# Altium PCB imu_sense.PcbDoc (part 2 of 2)
Units mil, origin at the board's own origin, x right, y up, seen from the top; angles counter-clockwise.
Board outline 2000 x 2000 mil, 2 copper layers (Top Layer, Bottom Layer); 188 components, 109 nets, 611 pads, 219 vias.
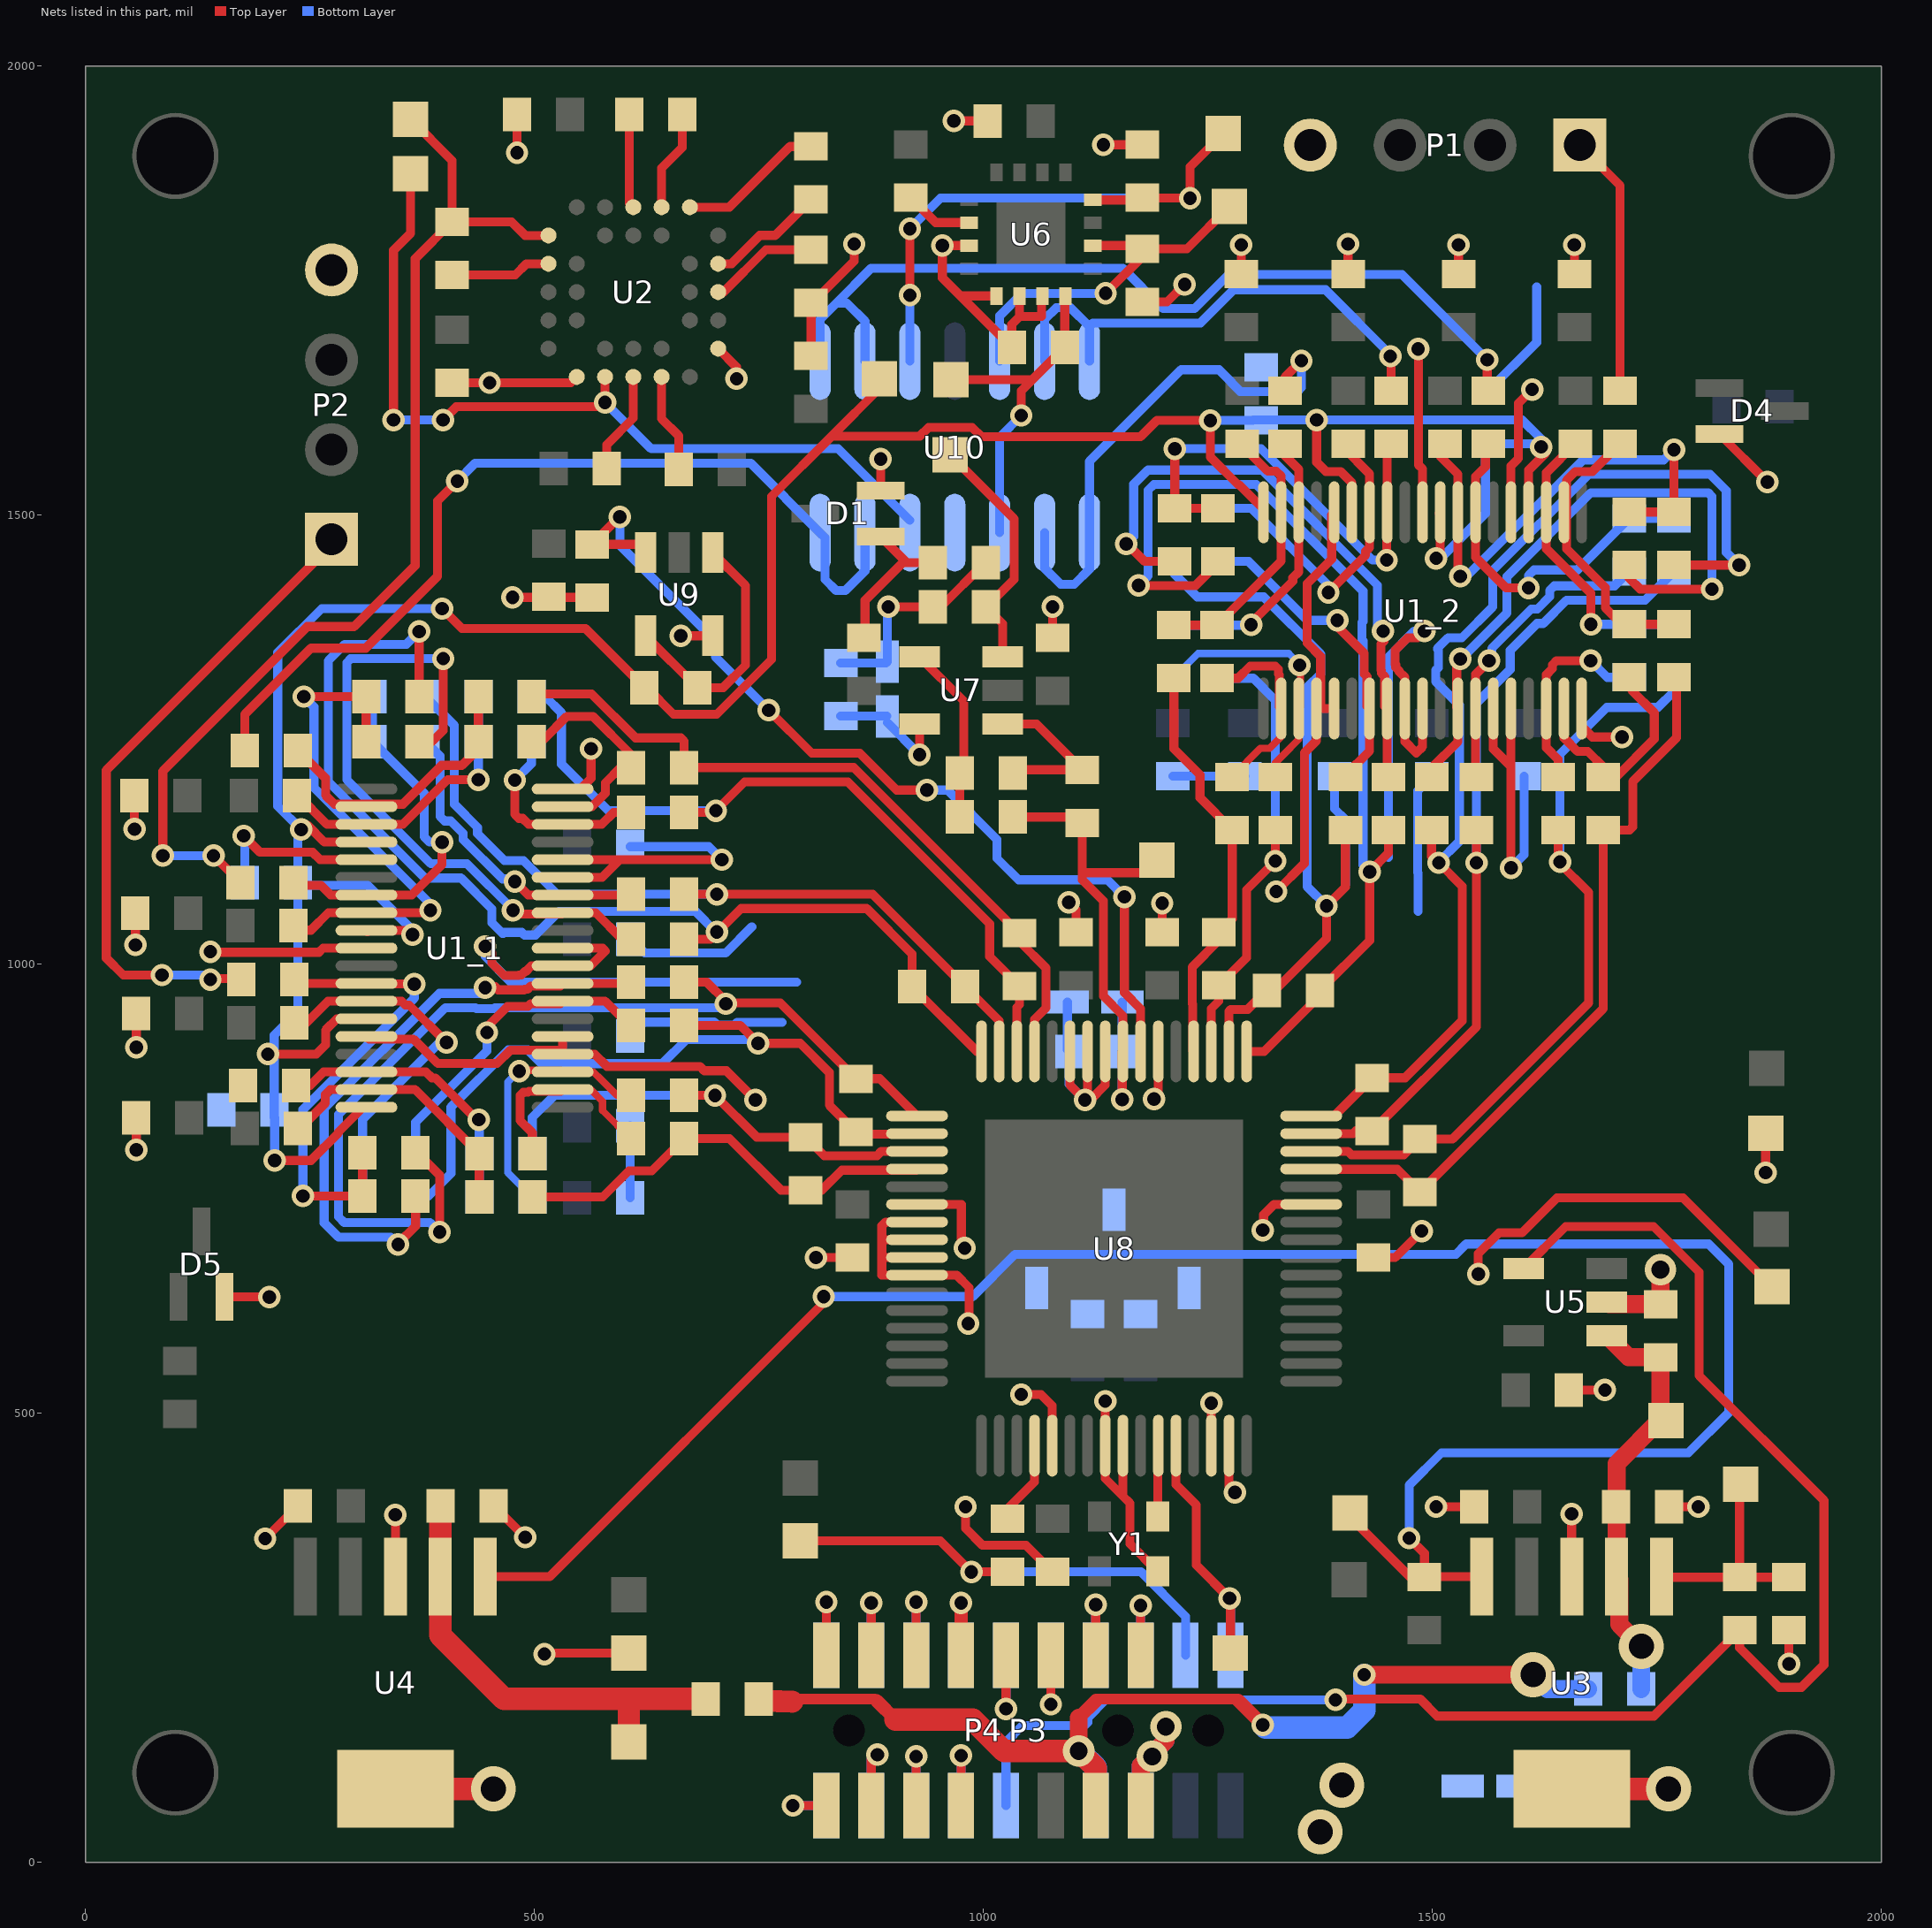
[diagram p2: the nets of this part, all layers, seen from the top]

## Via types
v1: diameter 25, hole 15, Top Layer to Bottom Layer, tented both sides, 165 vias
v2: diameter 25, hole 15, Top Layer to Bottom Layer, 31 vias
v3: diameter 50, hole 28, Top Layer to Bottom Layer, tented both sides, 7 vias
v4: diameter 50, hole 25, Top Layer to Bottom Layer, 6 vias
v5: diameter 35, hole 20, Top Layer to Bottom Layer, tented both sides, 4 vias
v6: diameter 50, hole 25, Top Layer to Bottom Layer, tented both sides, 3 vias
v7: diameter 35, hole 20, Top Layer to Bottom Layer, 2 vias
v8: diameter 40, hole 20, Top Layer to Bottom Layer, tented both sides, 1 vias

## Nets (pads, with @x,y where several pads share a name; then routed paths per layer and width w, separated by ;. In a path a pad name is that pad's centre, name@x,y a point inside that pad or via, vN(x,y) a via of type N, cw(c..) or ccw(c..) an arc to the next point about the centre after c; other vN are vias at no path point) (continued)
AGND: C2_1.1 C2_2.1 C5_1.1 C5_2.1 C8_1.1 C8_2.1 C11_1.2 C11_2.2 C12_1.2 C12_2.2 C13_1.2 C13_2.2 C14_1.2 C14_2.2 C15_1.2 C15_2.2 C16_1.2 C16_2.2 C17_1.2 C17_2.2 C19.2 C20.2 C22.2 C25.2 C27.2 C28.2 C29.2 C31.2 C32.2 C33.2 C34.1 C35.1 C36.1 C38.1 C39.2 C40.2 C41.2 C42.2 C43.1 C44.2 C54.2 C55.2 C56.2 C57.2 C60_1.2 C60_2.2 C62.2 D1.2 D4.2 D5.2 NT1.2 P1.4 P2.4 T3.0 T6.0 U1_1.5 U1_1.10 U1_1.15 U1_1.23 U1_1.24 U1_1.28 U1_1.29 U1_1.33 U1_1.34 U1_1.38 U1_2.5 U1_2.10 U1_2.15 U1_2.23 U1_2.24 U1_2.28 U1_2.29 U1_2.33 U1_2.34 U1_2.38 U2.F7 U2.G2 U3.3 U3.6 U4.3 U4.6 U6.3 U6.5 U6.6 U6.7 U7.5 U8.6 U8.43 U8.54 U8.57 U8.58 U8.59 U9.5 U10.11 | length 7545.9
  Top Layer w10: v2(54.47,1150.53) C5_1.1@54.47,1188 ; v2(55.47,1021.53) C13_1.2@55.47,1057 ; v2(56.47,793.47) C60_1.2@56.47,829 ; v2(56.47,907.53) C17_1.2@56.47,945 ; v1@139.7,1013.3 259.83,1013.3 264.53,1018 U1_1.10@312.75,1018 ; D5.2@154.59,629.58 v2(204.58,629.58) ; v1(176,1143) 194.3,1124.7 252.83,1124.7 261.11,1116.43 U1_1.5@312.75,1116.43 ; v1(200,360.53) C29.2@236.47,397 ; U1_1.15@312.75,919.57 315.53,916.8 364.97,916.8 392.27,889.5 458.27,889.5 473.27,904.5 U1_1.23@526.64,904.5 ; U4.3@345,318.11 v1(345,387) ; C20.2@408,1647.47 v1(450,1647.47) 540.48,1647.47 U2.G2@547.02,1654.01 ; v1(445,1020) 452.5,1012.5 452.5,1001.27 466.27,987.5 481.79,987.5 482.45,988.17 485.39,988.17 489.08,991.85 490.08,991.85 496.55,998.31 U1_1.28@531.25,998.31 ; C32.2@454.53,397 v1(489.53,362) ; v1(475.47,1408.47) 516,1408.47 C44.2@564,1408.47 ; v1(480.47,1903.53) C19.2@480.47,1946 ; U1_1.28@498.48,998.31 U1_1.28@531.25,998.31 ; v1(511,232) 512,233 T6.0@605,233 ; U1_1.24@531.25,919.57 U1_1.23@531.25,899.89 566.95,899.89 580.54,886.3 684.23,886.3 689.03,881.5 713.5,881.5 v1(746,849) ; U1_1.29@531.25,1018 575.72,1018 579,1014.72 562.59,998.31 U1_1.28@531.25,998.31 ; U1_1.33@531.25,1096.74 575.31,1096.74 595,1116.43 ; U1_1.34@531.25,1116.43 595,1116.43 ; U1_1.38@531.25,1195.17 551.17,1195.17 563,1207 v1(563,1240) ; v1(662.74,1365.74) U9.5@698.4,1365.74 ; U2.F7@704.5,1685.5 725,1665 v1(725,1652) ; v1(708.57,1116.43) 595,1116.43 ; C22.2@808,1677.53 C25.2@808,1736.47 809.47,1736.47 856,1783 v2(856,1802) ; v1(813.47,673.47) C54.2@854,673.47 ; D1.2@885.42,1527.59 v1(885.42,1562.58) ; U8.6@925.93,732.7 975.3,732.7 975.3,687.7 v1(979,684) ; v1(928.74,1233.26) U7.5@928.74,1267.6 ; v1(967,1939) C33.2@1004.47,1939 ; U6.3@984.1,1800.2 v1(954.2,1800.2) 954.2,1764.27 974.37,1744.1 ; U6.5@1014.61,1744.1 974.37,1744.1 ; U6.6@1040.2,1744.1 1040.2,1721.2 ; U6.7@1065.8,1744.1 1064.8,1743.1 1064.8,1721.2 1040.2,1721.2 ; C38.1@1077,1363.53 v1(1077,1398) ; v1(1095,1069) 1103,1061 C56.2@1103,1035.53 ; U8.59@1096.21,902.98 1096.21,865.79 v1(1113,849) 1115.89,851.89 U8.58@1115.89,902.98 ; v1@1119,849 1135.58,865.58 U8.57@1135.58,902.98 ; v1(1133.47,1912.53) C36.1@1177,1912.53 ; C35.1@1177,1737.47 1204.47,1737.47 v2(1224,1757) ; v1(1190,850) 1194.63,854.63 U8.54@1194.63,902.98 ; C57.2@1199,1035.53 v1(1199,1068) ; C5_2.1@1287,1768.53 v2(1287,1801) ; v1(1311,704) 1312,705 1312,721 1323.7,732.7 U8.43@1364.91,732.7 ; v1(1326,1081) 1357.3,1112.3 1357.3,1235.46 1370.89,1249.05 U1_2.23@1370.89,1284.75 U1_2.24@1390.57,1284.75 ; U1_2.23@1375.5,1289.36 1375.5,1342.73 1360.5,1357.73 1360.5,1423.73 1387.8,1451.03 1387.8,1500.47 U1_2.15@1390.57,1503.25 ; C13_2.2@1406,1768.53 v2(1406,1802) ; C55.2@1434,673.47 1458.47,673.47 v1(1488,703) ; U1_2.28@1469.31,1317.52 U1_2.28@1469.31,1284.75 ; v1(1484,1685) 1484.3,1684.7 1484.3,1556.17 1489,1551.47 U1_2.10@1489,1503.25 ; U1_2.29@1489,1284.75 1489,1242.28 1482,1235.28 1469.31,1247.96 U1_2.28@1469.31,1284.75 ; v1(1491,1371) 1483.5,1363.5 1472.27,1363.5 1458.5,1349.73 1458.5,1334.21 1459.17,1333.55 1459.17,1330.61 1462.85,1326.92 1462.85,1325.92 1469.31,1319.45 U1_2.28@1469.31,1284.75 ; v1(1504,396) C28.2@1546.47,396 ; C17_2.2@1529,1768.53 v2(1529,1801) ; U1_2.33@1567.74,1284.75 1567.74,1239.79 1587.43,1220.11 ; v1(1587.43,1107.43) 1587.43,1220.11 ; U1_2.34@1587.43,1284.75 1587.43,1220.11 ; U1_2.5@1587.43,1503.25 1587.43,1554.89 1595.7,1563.17 1595.7,1624.7 v1(1611,1640) ; U3.3@1655,318.11 v1(1655,388) ; C60_2.2@1658,1768.53 v2(1658,1801) ; U1_2.38@1666.17,1284.75 1666.17,1264.83 1678,1253 v1(1711,1253) ; C31.2@1763.53,396 v1(1796,396) ; D4.2@1819.58,1590.41 v2(1872.99,1537) ; v1(1871,768) T3.0@1871,812 ; v1(1897,221) C27.2@1897,258.47 ; 974.37,1744.1 C34.1@1031.47,1687 1031.47,1712.47 1040.2,1721.2
  Top Layer w25: U4.6@345,81.89 v3(454.11,81.89) ; U3.6@1655,81.89 v3(1762.89,81.89)
  Bottom Layer w10: C2_1.1@177.47,1091 v1@177.47,1141.53 ; v1(445,1020) 445,1008.77 473.77,980 478,980 792,980 ; C14_1.2@606.53,740 C12_1.2@606.53,820 ; C15_1.2@606.53,920 622.15,935.62 700.15,935.62 703.27,932.5 722.73,932.5 725.73,935.5 775.5,935.5 ; C11_1.2@606.53,1131 694,1131 v1(708.57,1116.43) ; C16_1.2@607.53,1028 623.03,1012.5 712.73,1012.5 742,1041.77 ; C42.2@841,1276.47 C41.2@892.5,1276.47 ; C41.2@893,1269 v1(928.74,1233.26) ; C39.2@1093.49,958 1093.49,904.98 C40.2@1095.47,903 1095.47,866.53 v1(1113,849) ; C14_2.2@1211,1209.47 C12_2.2@1291,1209.47 ; C15_2.2@1391,1209.47 1391,1173 1403,1161 1403,1089 ; 1451,1119 1451,1338 1451,1342.23 1479.77,1371 v1(1491,1371) ; 1484,1059 1484,1101.77 1483.5,1102.27 1483.5,1192.97 C16_2.2@1499,1208.47 ; C2_2.1@1562,1638.53 1616,1692.53 1616,1754 ; v1(1587.43,1107.43) 1602,1122 C11_2.2@1602,1209.47
  other v1: 139,1014
CLK_A: P3.20 T5.0 U8.28 | length 318.5
  Top Layer w10: U8.28@1214.32,464 1214.32,420.68 1237,398 1237,331 v1(1274,294) ; T5.0@1275,233 v1@1275,293
  Bottom Layer w10: v1(1274,294) 1275,293 P3.20@1275,230.66
DGND: C26.2 C30.2 C53.1 C58.2 C59.2 C61.2 C63.2 NT1.1 P3.15 P4.16 T4.0 U5.2 U8.7 U8.8 U8.9 U8.10 U8.21 U8.24 U8.25 U8.30 U8.31 Y1.2 | length 1670.3
  Top Layer w10: 887.09,673.65 U8.9@925.93,673.65 ; 888.41,693.33 U8.8@925.93,693.33 ; U8.7@925.93,713.02 891.02,713.02 886.74,708.74 886.74,653.96 U8.10@925.93,653.96 970.04,653.96 984,640 984,601 v1(983,600) ; v1(980,396) 980,372 999,353 1047.48,353 C53.1@1077,323.47 ; v1(1042,521) 1064,521 1076.52,508.48 U8.21@1076.52,464 ; v1(1135.58,513.58) U8.24@1135.58,464 1135.58,427.42 1155.26,407.74 ; U8.25@1155.26,464 1155.26,407.74 ; Y1.2@1193.96,323.98 1163,354.94 1163,400 1155.26,407.74 ; U8.30@1253.69,464 v1(1253.69,511.31) ; U8.31@1273.37,464 1273.37,418.63 v1(1280,412) ; v1(1551,655) 1551,678 1574,701 1599.63,701 1638.63,740 1779,740 T4.0@1878,641 ; C26.2@1651.53,526 v1(1692,526)
  Top Layer w20: P4.16@1175,63.34 1175,108 v5@1186.24,119.24 ; v5(1188,118) 1187.48,118 v5@1186.24,119.24 ; v5(1203,151) 1203,136 1186.5,119.5 v5@1186.24,119.24 ; U5.2@1696.73,621.53 C30.2@1754,621.53 v5(1754,660)
  Bottom Layer w10: v1(1280,412) v1@1281,413
  Bottom Layer w20: P3.15@1175,63.34 1175,108 v5@1186.24,119.24 ; v5(1188,118) 1187.48,118 v5@1186.24,119.24 ; v5(1203,151) 1203,136 1186.5,119.5 v5@1186.24,119.24
  other v3: 1375,34 1399,86
EN_SIG: P3.7 P4.8 | length 111.3
  Top Layer w10: P4.8@975,63.34 v1(975,119)
  Bottom Layer w10: P3.7@975,63.34 v1(975,119)
FLTR_A_N1: C48.1 R2_1.2 R3_1.2 U8.61 | length 788.4
  Top Layer w10: R2_1.2@495.53,1301 496.53,1301 563.53,1301 612.53,1252 663,1252 666.53,1248.47 R3_1.2@666.53,1219 855.53,1219 C48.1@1040,1034.53 1040,1025.48 1069.7,995.78 1069.7,951.55 1056.84,938.68 U8.61@1056.84,935.86
FLTR_A_N2: C52.1 R2_2.2 R3_2.2 U8.45 | length 841.4
  Top Layer w10: U8.45@1364.91,772.07 1365.25,771.72 1460.75,771.72 C52.1@1486,746.47 1690,950.47 R3_2.2@1690,1149.47 1719.47,1149.47 1723,1153 1723,1203.47 1772,1252.47 1772,1319.47 R2_2.2@1772,1320.47
FLTR_A_P1: C48.2 R4_1.2 R6_1.2 U8.62 | length 854.8
  Top Layer w10: R4_1.2@666.53,1169 702,1169 703,1170 v1@704,1171 ; v1(702,1171) 734,1203 848.9,1203 1006.85,1045.05 1006.85,1008.62 C48.2@1040,975.47 1040,955 1037.15,952.15 U8.62@1037.15,902.98
  Bottom Layer w10: R6_1.2@512,1298 530,1280 530,1223 582,1171 v1(702,1171)
FLTR_A_P2: C52.2 R4_2.2 R6_2.2 U8.46 | length 866.2
  Top Layer w10: U8.46@1364.91,791.76 1405.71,791.76 1409.74,787.72 1468.2,787.72 C52.2@1486,805.53 1522.43,805.53 1674,957.1 1674,1080 1641,1113 1640,1114 v1@1640,1116 ; R4_2.2@1640,1149.47 v1@1640,1116 ; v1(1642,1114) v1@1640,1116
  Bottom Layer w10: v1(1642,1114) 1642,1234 1694,1286 1751,1286 R6_2.2@1769,1304
FLTR_B_N1: C47.1 R8_1.2 R9_1.2 U8.63 | length 914.4
  Top Layer w10: R9_1.2@666.53,1078 v1(703,1078) 876.53,1078 C47.1@979.53,975 1017.47,937.06 U8.63@1017.47,902.98
  Bottom Layer w10: R8_1.2@378.53,1298 410.72,1265.81 410.72,1178.14 436.5,1152.36 436.5,1145.52 466.52,1115.5 487.73,1115.5 525.23,1078 v1(703,1078)
FLTR_B_N2: C51.1 R8_2.2 R9_2.2 U8.47 | length 923.4
  Top Layer w10: U8.47@1364.91,811.44 1411.44,811.44 1414.47,814.47 C51.1@1433,814.47 1549,930.47 v1(1549,1113) R9_2.2@1549,1149.47
  Bottom Layer w10: v1(1549,1113) 1549,1290.77 1586.5,1328.27 1586.5,1349.48 1616.52,1379.5 1623.36,1379.5 1649.14,1405.28 1736.81,1405.28 R8_2.2@1769,1437.47
FLTR_B_P1: C47.2 R10_1.2 R12_1.2 U8.64 | length 1290.1
  Top Layer w10: R12_1.2@371.53,1298 v1(371.53,1370.47) ; R10_1.2@666.53,1028 696,1028 v1@703.5,1035.5 ; v1@704,1036 v1@703.5,1035.5 ; U8.64@997.78,902.98 992.5,902.98 C47.2@920.47,975 920.47,1011.43 869.9,1062 730,1062 v1@703.5,1035.5
  Bottom Layer w10: v1(371.53,1370.47) 357.33,1356.28 288.65,1356.28 270.37,1338 270.37,1203.37 377.75,1096 418.14,1096 452.5,1061.64 452.5,1046.27 464.27,1034.5 465.26,1034.5 466.27,1035.5 485.73,1035.5 488.74,1032.5 501,1032.5 527.5,1059 679,1059 702.5,1035.5 703,1035 v1(703,1036)
FLTR_B_P2: C51.2 R10_2.2 R12_2.2 U8.48 | length 1296.3
  Top Layer w10: U8.48@1364.91,831.13 1390.6,831.13 C51.2@1433,873.53 1469.43,873.53 1533,937.1 1533,1087 v1(1507,1113) ; R10_2.2@1499,1149.47 1499,1120 1506.5,1112.5 v1@1507,1112 ; R12_2.2@1769,1444.47 v1(1841.47,1444.47)
  Bottom Layer w10: v1(1507,1113) 1506,1113 1506.5,1113.5 1530,1137 1530,1288.5 1503.5,1315 1503.5,1327.26 1506.5,1330.27 1506.5,1349.73 1505.5,1350.74 1505.5,1351.73 1517.27,1363.5 1532.64,1363.5 1567,1397.86 1567,1438.25 1674.37,1545.63 1809,1545.63 1827.28,1527.35 1827.28,1458.67 v1(1841.47,1444.47)
FLTR_C_N1: C46.1 R14_1.2 R15_1.2 U8.1 | length 1142.9
  Top Layer w10: R14_1.2@367.53,790 369.53,790 394.28,765.26 v1(394.28,701.72) ; R15_1.2@666.53,980 692,980 713,959 v1(713,956) ; v1@715,957 773.53,957 C46.1@858,872.53 884.53,872.53 U8.1@925.93,831.13
  Bottom Layer w10: v1(394.28,701.72) 383.7,712.3 288.17,712.3 281.72,718.74 281.72,832.72 400.62,951.62 434.15,951.62 435.27,950.5 454.73,950.5 455.85,951.62 705.62,951.62 711.5,957.5 713,959 v1(713,956)
FLTR_C_N2: C50.1 R14_2.2 R15_2.2 U8.49 | length 1142
  Top Layer w10: v1(1172.72,1421.72) 1236.26,1421.72 1261,1446.47 R14_2.2@1261,1448.47 ; U8.49@1293.06,902.98 1312.6,902.98 1374.53,964.9 C50.1@1374.53,971 1430,1026.47 v1(1430,1103) 1451,1124 R15_2.2@1451,1149.47
  Bottom Layer w10: v1(1172.72,1421.72) 1183.3,1432.3 1183.3,1527.83 1189.74,1534.28 1303.72,1534.28 1422.62,1415.38 1422.62,1381.85 1421.5,1380.73 1421.5,1361.27 1422.62,1360.15 1422.62,1110.38 v1(1430,1103)
FLTR_C_P1: C46.2 R16_1.2 R18_1.2 U8.2 | length 840
  Top Layer w10: R16_1.2@666.53,932 729,932 v1(749,912) 795.9,912 828.3,879.6 828.3,843.17 C46.2@858,813.47 860.47,811 U8.2@925.49,811
  Bottom Layer w10: R18_1.2@367.53,742 382,742 407,767 407,841 470.62,904.62 492.62,904.62 507.93,889.3 642.3,889.3 669,916 v1@749,916
FLTR_C_P2: C50.2 R16_2.2 R18_2.2 U8.50 | length 826
  Top Layer w10: U8.50@1273.37,902.98 1273.37,947.74 1275.35,949.72 1294.2,949.72 C50.2@1315.47,971 1324.52,971 1382,1028.48 v1(1382,1065) 1403,1086 R16_2.2@1403,1149.47
  Bottom Layer w10: R18_2.2@1213,1448.47 1213,1434 1238,1409 1312,1409 1375.62,1345.38 1375.62,1323.38 1360.3,1308.07 1360.3,1086.7 v1(1382,1065)
FLTR_D_N1: C45.1 R20_1.2 R21_1.2 U8.3 | length 543.5
  Top Layer w10: R21_1.2@666.53,854 v1(701,854) 747.47,807.53 C45.1@802,807.53 822.8,786.72 881.26,786.72 886.29,791.76 U8.3@925.93,791.76
  Bottom Layer w10: R20_1.2@497.53,789 497.53,829.53 522,854 v1(701,854)
FLTR_D_N2: C49.1 R20_2.2 R21_2.2 U8.51 | length 530.2
  Top Layer w10: U8.51@1253.69,902.98 1253.69,950.69 1262,959 C49.1@1262,976.47 1293,1007.47 1293,1083 v1(1325,1115) R21_2.2@1325,1149.47
  Bottom Layer w10: R20_2.2@1260,1318.47 1300.53,1318.47 1325,1294 v1(1325,1115)
FLTR_D_P1: C45.2 R22_1.2 R24_1.2 U8.4 | length 487
  Top Layer w10: R24_1.2@497.53,741 576,741 605,770 630.53,770 R22_1.2@666.53,806 717,806 774.53,748.47 C45.2@802,748.47 819.94,748.47 842.19,770.72 U8.4@924.58,770.72
FLTR_D_P2: C49.2 R22_2.2 R24_2.2 U8.52 | length 460.2
  Top Layer w10: R24_2.2@1212,1318.47 1212,1240 1241,1211 1241,1185.47 R22_2.2@1277,1149.47 1277,1050.53 C49.2@1262,1035.53 1262,1026.48 1232.3,996.78 1232.3,956.17 1233,955.47 U8.52@1233,903.98
FLTR_IN_A1: R1_1.1 U10.13 U10.14 | length 1033.7
  Top Layer w10: R1_1.1@177.47,1238 177.47,1278.47 251,1352 312,1352 392,1432 392,1516 v1(414,1538)
  Bottom Layer w10: v1(414,1538) 434,1558 740.53,1558 U10.14@818,1480.53 823.5,1475.03 823.5,1428.5 836,1416 846,1416 868,1438 U10.13@868,1480.53
FLTR_IN_A2: P1.1 R1_2.1 | length 292.1
  Top Layer w10: P1.1@1664,1912 1709,1867 R1_2.1@1709,1638.53
FLTR_IN_B1: C21.2 R7_1.1 T16.0 U2.B1 | length 1220.5
  Top Layer w10: v2(86,1121) 86,1215 247,1376 299,1376 367,1444 367,1785.53 C21.2@408,1826.53 ; v2(142.47,1121) R7_1.1@172.47,1091 R7_1.1@177.47,1091 ; T16.0@362,1941 408,1895 C21.2@408,1826.53 ; U2.B1@515.52,1811.49 489.51,1811.49 474.47,1826.53 C21.2@408,1826.53
  Bottom Layer w10: v2(86,1121) v2(142.47,1121)
FLTR_IN_B2: R7_2.1 U10.1 U10.2 | length 1006.6
  Top Layer w10: v2(1561,1673) 1561,1639.53 R7_2.1@1562,1638.53
  Bottom Layer w10: U10.1@818,1671.47 818,1718 836,1736 ; U10.2@868,1671.47 868,1716 848,1736 836,1736 ; v2(1561,1673) 1466,1768 1273,1768 1235,1730 1200,1730 1155,1775 875,1775 836,1736
FLTR_IN_C1: P2.1 R13_1.1 | length 727.8
  Top Layer w10: v2(85,988) 42,988 23,1007 23,1216 P2.1@274,1467 ; v2(139,983) 140,984 R13_1.1@172.47,984 ; R13_1.1@173.47,983 R13_1.1@177.47,983
  Bottom Layer w10: v2(85,988) 134,988 v2(139,983)
FLTR_IN_C2: R13_2.1 U10.6 U10.7 | length 572.7
  Top Layer w10: v2(1453,1677) 1454,1676 R13_2.1@1454,1638.53
  Bottom Layer w10: U10.6@1068,1671.47 1068,1718 1081,1731 1097,1731 U10.7@1118,1710 ; U10.7@1118,1671.47 U10.7@1118,1710 ; v2(1453,1677) 1454,1678 1381,1751 1278.63,1751 1241.63,1714 1122,1714 U10.7@1118,1710
FLTR_IN_D1: R19_1.1 | length 1.4
  Top Layer w10: R19_1.1@176.47,866 R19_1.1@177.47,865
FLTR_IN_D2: R19_2.1 U10.8 U10.9 | length 585.4
  Top Layer w10: R19_2.1@1336,1638.53 1336,1654 v2(1354,1672)
  Bottom Layer w10: U10.9@1068,1480.53 1068,1441 1086,1423 1101,1423 1118,1440 U10.8@1118,1480.53 1118,1560 1220.03,1662.03 1262.21,1662.03 1275.97,1648.26 1275.97,1647.55 1285.74,1637.78 1349.78,1637.78 1354,1642 v2(1354,1672)
MISO: P3.3 P4.4 | length 124.7
  Top Layer w10: P4.4@875,63.34 875,118 877,120 v1(881.87,120)
  Bottom Layer w10: P3.3@875,63.34 875,118 877,120 v1(881.87,120)
MISO_A: P3.18 R44.2 T22.0 | length 547.7
  Top Layer w10: T22.0@796,358 951.94,358 v1(986.47,323.47) R44.2@1027,323.47
  Bottom Layer w10: v1(986.47,323.47) 1175.53,323.47 1225,274 P3.18@1225,230.66
MOSI: P3.1 P4.2 | length 74.7
  Top Layer w10: v1(787.66,63.34) P4.2@825,63.34
  Bottom Layer w10: v1(787.66,63.34) P3.1@825,63.34
NetC1_1_1: C1_1.1 R3_1.1 U1_1.37 | length 229.4
  Top Layer w10: C1_1.1@495.53,1251 496.53,1251 511,1251 536,1276 565,1276 R3_1.1@607.47,1233.53 ; U1_1.37@531.25,1175.48 564.02,1175.48 579,1190.46 579,1202 R3_1.1@596,1219
NetC1_1_2: C1_1.2 R1_1.2 R2_1.1 U1_1.2 | length 324.6
  Top Layer w10: R1_1.2@236.53,1238 267.3,1207.23 267.3,1188.16 277.2,1178.26 312.75,1178.26 353.26,1178.26 396.47,1221.47 419.1,1221.47 437.47,1239.84 C1_1.2@437.47,1248 ; C1_1.2@437.47,1243.94 C1_1.2@437.47,1248 ; R2_1.1@437.47,1298 C1_1.2@437.47,1248
NetC1_2_1: C1_2.1 R3_2.1 U1_2.37 | length 229.4
  Top Layer w10: U1_2.37@1646.48,1284.75 1646.48,1251.98 1661.46,1237 1673,1237 R3_2.1@1690,1220 ; R3_2.1@1704.53,1208.53 1747,1251 1747,1280 1722,1305 1722,1319.47 C1_2.1@1722,1320.47
NetC1_2_2: C1_2.2 R1_2.2 R2_2.1 U1_2.2 | length 324.6
  Top Layer w10: R1_2.2@1709,1579.47 1678.23,1548.7 1659.16,1548.7 1649.26,1538.8 1649.26,1503.25 1649.26,1462.74 1692.47,1419.53 1692.47,1396.9 1710.84,1378.53 C1_2.2@1719,1378.53 ; C1_2.2@1714.94,1378.53 C1_2.2@1719,1378.53 ; R2_2.1@1769,1378.53 C1_2.2@1719,1378.53
NetC3_1_1: C3_1.1 R4_1.1 U1_1.36 | length 228.5
  Top Layer w10: v1(478,1205) 478,1167 482.5,1162.5 486.73,1162.5 493.44,1155.8 U1_1.36@531.25,1155.8 ; U1_1.36@531.05,1156 U1_1.36@531.25,1155.8 ; R4_1.1@607.47,1169 588,1169 574.8,1155.8 U1_1.36@531.25,1155.8
  Bottom Layer w10: v1(478,1205) 496.53,1223.53 C3_1.1@496.53,1248
NetC3_1_2: C3_1.2 R5_1.2 R6_1.1 U1_1.3 | length 327.4
  Top Layer w10: R5_1.2@236.53,1188 268.74,1155.8 U1_1.3@312.75,1155.8 353.42,1155.8 403.1,1205.47 v1(437.47,1205.47)
  Bottom Layer w10: v1(437.47,1205.47) C3_1.2@437.47,1248 R6_1.1@437.47,1298
NetC3_2_1: C3_2.1 R4_2.1 U1_2.36 | length 228.5
  Top Layer w10: U1_2.36@1627,1284.95 U1_2.36@1626.8,1284.75 ; R4_2.1@1640,1208.53 1640,1228 1626.8,1241.2 U1_2.36@1626.8,1284.75 ; v1(1676,1338) 1638,1338 1633.5,1333.5 1633.5,1329.27 1626.8,1322.56 U1_2.36@1626.8,1284.75
  Bottom Layer w10: v1(1676,1338) 1694.53,1319.47 C3_2.1@1719,1319.47
NetC3_2_2: C3_2.2 R5_2.2 R6_2.1 U1_2.3 | length 327.4
  Top Layer w10: R5_2.2@1659,1579.47 1626.8,1547.26 U1_2.3@1626.8,1503.25 1626.8,1462.58 1676.47,1412.9 v1(1676.47,1378.53)
  Bottom Layer w10: v1(1676.47,1378.53) C3_2.2@1719,1378.53 R6_2.1@1769,1378.53
NetC4_1_1: C4_1.1 R9_1.1 U1_1.32 | length 338.1
  Top Layer w10: v1(478,1092) 492.94,1077.06 U1_1.32@531.25,1077.06 R9_1.1@596.53,1077.06
  Bottom Layer w10: C4_1.1@378.53,1248 394.72,1231.8 394.72,1164.67 399.89,1159.5 406.73,1159.5 420.5,1145.73 420.5,1138.89 464.39,1095 478,1095 481,1095 v1(478,1092)
NetC4_1_2: C4_1.2 R7_1.2 R8_1.1 U1_1.7 | length 406.4
  Top Layer w10: R7_1.2@236.53,1088 262,1088 272.94,1077.06 U1_1.7@312.75,1077.06 363.06,1077.06 397,1111 v1(397,1136)
  Bottom Layer w10: R8_1.1@319.47,1298 C4_1.2@319.47,1248 377,1190.47 377,1142 383,1136 v1(397,1136)
NetC4_2_1: C4_2.1 R9_2.1 U1_2.32 | length 338.1
  Top Layer w10: R9_2.1@1548.06,1219.47 U1_2.32@1548.06,1284.75 1548.06,1323.06 v1(1563,1338)
  Bottom Layer w10: v1(1563,1338) 1566,1335 1566,1338 1566,1351.61 1609.89,1395.5 1616.73,1395.5 1630.5,1409.27 1630.5,1416.11 1635.67,1421.28 1702.8,1421.28 C4_2.1@1719,1437.47
NetC4_2_2: C4_2.2 R7_2.2 R8_2.1 U1_2.7 | length 406.4
  Top Layer w10: R7_2.2@1559,1579.47 1559,1554 1548.06,1543.06 U1_2.7@1548.06,1503.25 1548.06,1452.94 1582,1419 v1(1607,1419)
  Bottom Layer w10: v1(1607,1419) 1607,1433 1613,1439 1661.47,1439 C4_2.2@1719,1496.53 R8_2.1@1769,1496.53
NetC6_1_1: C6_1.1 R10_1.1 U1_1.31 | length 733.4
  Top Layer w10: C6_1.1@371.53,1248 386,1248 398.28,1260.28 v1(398.28,1340.28) ; v1(476,1060) 476,1056 U1_1.31@529.88,1056 ; U1_1.31@531.25,1057.37 568.1,1057.37 R10_1.1@597.47,1028
  Bottom Layer w10: v1(398.28,1340.28) 295.28,1340.28 291,1336 291,1205.37 384.37,1112 424.77,1112 476,1060.77 v1(476,1060)
NetC6_1_2: C6_1.2 R11_1.2 R12_1.1 U1_1.8 | length 572.5
  Top Layer w10: R11_1.2@236.53,1038 251,1038 270.37,1057.37 U1_1.8@312.75,1057.37 381.37,1057.37 v1(384,1060) ; v1(243,1298) R12_1.1@312.47,1298 C6_1.2@312.47,1248
  Bottom Layer w10: v1(243,1298) 254.37,1286.63 254.37,1196.75 384,1067.12 v1(384,1060)
NetC6_2_1: C6_2.1 R10_2.1 U1_2.31 | length 733.4
  Top Layer w10: R10_2.1@1499,1218.53 1528.37,1247.9 U1_2.31@1528.37,1284.75 ; U1_2.31@1527,1286.12 1527,1340 v1(1531,1340) ; C6_2.1@1719,1444.47 1719,1430 1731.28,1417.72 v1(1811.28,1417.72)
  Bottom Layer w10: v1(1531,1340) 1531.77,1340 1583,1391.23 1583,1431.63 1676.37,1525 1807,1525 1811.28,1520.72 v1(1811.28,1417.72)
NetC6_2_2: C6_2.2 R11_2.2 R12_2.1 U1_2.8 | length 572.5
  Top Layer w10: R11_2.2@1509,1579.47 1509,1565 1528.37,1545.63 U1_2.8@1528.37,1503.25 1528.37,1434.63 v1(1531,1432) ; C6_2.2@1719,1503.53 R12_2.1@1769,1503.53 v1(1769,1573)
  Bottom Layer w10: v1(1531,1432) 1538.12,1432 1667.75,1561.63 1757.63,1561.63 v1(1769,1573)
NetC7_1_1: C7_1.1 R15_1.1 U1_1.27 | length 677.6
  Top Layer w10: v1@348,689 367.53,708.53 C7_1.1@367.53,742 ; v1(445,974) 446,975 456.14,975 459.64,971.5 488.41,971.5 489.08,972.17 492.02,972.17 495.71,975.85 U1_1.27@528.47,975.85 ; U1_1.27@531.25,978.63 R15_1.1@606.1,978.63
  Bottom Layer w10: v1(348,688) 339.7,696.3 281.54,696.3 265.72,712.12 265.72,839.35 393.99,967.62 438.62,967.62 v1(445,974)
NetC7_1_2: C7_1.2 R13_1.2 R14_1.1 U1_1.12 | length 528
  Top Layer w10: R13_1.2@239.16,978.63 U1_1.12@312.75,978.63 ; v1(242,742) C7_1.2@308.47,742 R14_1.1@308.47,790 ; U1_1.12@313.38,978 v1(366,978)
  Bottom Layer w10: v1(242,742) 242,838.25 366,962.25 v1(366,978)
NetC7_2_1: C7_2.1 R15_2.1 U1_2.27 | length 677.6
  Top Layer w10: v1@1160,1468 1179.53,1448.47 C7_2.1@1213,1448.47 ; v1(1445,1371) 1446,1370 1446,1359.86 1442.5,1356.36 1442.5,1327.59 1443.17,1326.92 1443.17,1323.98 1446.85,1320.29 U1_2.27@1446.85,1287.53 ; R15_2.1@1449.63,1209.9 U1_2.27@1449.63,1284.75
  Bottom Layer w10: v1(1159,1468) 1167.3,1476.3 1167.3,1534.46 1183.12,1550.28 1310.35,1550.28 1438.62,1422.01 1438.62,1377.38 v1(1445,1371)
NetC7_2_2: C7_2.2 R13_2.2 R14_2.1 U1_2.12 | length 528
  Top Layer w10: v1(1213,1574) C7_2.2@1213,1507.53 R14_2.1@1261,1507.53 ; v1(1449,1450) U1_2.12@1449,1502.62 ; U1_2.12@1449.63,1503.25 R13_2.2@1449.63,1576.84
  Bottom Layer w10: v1(1213,1574) 1309.25,1574 1433.25,1450 v1(1449,1450)
NetC9_1_1: C9_1.1 R16_1.1 U1_1.26 | length 353
  Top Layer w10: v1(447,924) v1@449.25,924 ; v1@447,930.05 469.95,953 492.54,953 495.71,956.17 528.47,956.17 U1_1.26@531.25,958.94 578.52,958.94 R16_1.1@605.47,932
  Bottom Layer w10: C9_1.1@367.53,790 367.53,824.16 447,903.63 v1(447,924) v1@449.25,924
NetC9_1_2: C9_1.2 R17_1.2 R18_1.1 U1_1.13 | length 412
  Top Layer w10: R17_1.2@237.13,926 239.33,928.2 270.08,958.94 U1_1.13@312.75,958.94 351.82,958.94 356.27,954.5 360.5,954.5 v1(402,913)
  Bottom Layer w10: R18_1.1@308.47,742 C9_1.2@308.47,790 308.47,827.47 394,913 v1(402,913)
NetC9_2_1: C9_2.1 R16_2.1 U1_2.26 | length 356.6
  Top Layer w10: v1@1390.52,1379.52 1424,1346.05 1424,1323.46 1427.17,1320.29 1427.17,1287.53 U1_2.26@1429.94,1284.75 1429.94,1237.48 R16_2.1@1403,1210.53
  Bottom Layer w10: C9_2.1@1261,1448.47 1295.16,1448.47 1360.63,1383 v1(1394,1383)
NetC9_2_2: C9_2.2 R17_2.2 R18_2.1 U1_2.13 | length 412
  Top Layer w10: v1(1384,1414) 1425.5,1455.5 1425.5,1459.73 1429.94,1464.18 U1_2.13@1429.94,1503.25 1429.94,1545.92 1401.2,1574.67 R17_2.2@1397,1578.87
  Bottom Layer w10: R18_2.1@1213,1507.53 C9_2.2@1261,1507.53 1298.47,1507.53 1384,1422 v1(1384,1414)
NetC10_1_1: C10_1.1 R21_1.1 U1_1.22 | length 293.7
  Top Layer w8: v1(483,881) 483,882 U1_1.22@529.46,882 ; U1_1.22@531.25,880.2 565.42,880.2 574.33,871.3 574.45,871.3 591.75,854 R21_1.1@607.47,854
  Bottom Layer w8: v1(483,881) 483,882 482.5,881.5 470,869 470,767.94 496.94,741 C10_1.1@497.53,741
NetC10_1_2: C10_1.2 R19_1.2 R20_1.1 U1_1.17 | length 316.8
  Top Layer w10: R19_1.2@236.53,865 250,865 265.2,880.2 U1_1.17@312.75,880.2 378.93,880.2 385.64,873.5 389.5,873.5 437,826 v1(438,827)
  Bottom Layer w10: v1(438,827) 438.47,826.53 R20_1.1@438.47,789 C10_1.2@438.47,741
NetC10_2_1: C10_2.1 R21_2.1 U1_2.22 | length 293.7
  Top Layer w8: R21_2.1@1325,1208.53 1325,1224.25 1342.3,1241.55 1342.3,1241.67 1351.2,1250.58 U1_2.22@1351.2,1284.75 ; v1(1352,1333) 1353,1333 U1_2.22@1353,1286.54
  Bottom Layer w8: C10_2.1@1212,1318.47 1212,1319.06 1238.94,1346 1340,1346 1352.5,1333.5 1353,1333 v1(1352,1333)
NetC10_2_2: C10_2.2 R19_2.2 R20_2.1 U1_2.17 | length 316.8
  Top Layer w10: v1(1298,1378) 1297,1379 1344.5,1426.5 1344.5,1430.36 1351.2,1437.07 U1_2.17@1351.2,1503.25 1351.2,1550.8 1336,1566 R19_2.2@1336,1579.47
  Bottom Layer w10: C10_2.2@1212,1377.53 R20_2.1@1260,1377.53 1297.53,1377.53 v1(1298,1378)
NetC18_1_1: C18_1.1 R22_1.1 U1_1.21 | length 224.8
  Top Layer w8: U1_1.21@531.25,860.52 562.6,860.52 575.7,847.42 575.7,837.18 R22_1.1@606.88,806
  Top Layer w10: C18_1.1@497.53,789 497.53,812.47 484,826 484,854 487.5,857.5 492.73,857.5 493.73,858.5 529.23,858.5 U1_1.21@531.25,860.52
NetC18_1_2: C18_1.2 R23_1.2 R24_1.1 U1_1.18 | length 303.2
  Top Layer w10: R23_1.2@236.53,817 238.53,817 267,845.47 267,855 272.52,860.52 U1_1.18@312.75,860.52 366.95,860.52 C18_1.2@438.47,789 R24_1.1@438.47,741
NetC18_2_1: C18_2.1 R22_2.1 U1_2.21 | length 224.8
  Top Layer w8: R22_2.1@1277,1209.12 1308.18,1240.3 1318.42,1240.3 1331.52,1253.4 U1_2.21@1331.52,1284.75
  Top Layer w10: C18_2.1@1260,1318.47 1283.47,1318.47 1297,1332 1325,1332 1328.5,1328.5 1328.5,1323.27 1329.5,1322.27 1329.5,1286.77 U1_2.21@1331.52,1284.75
NetC18_2_2: C18_2.2 R23_2.2 R24_2.1 U1_2.18 | length 303.2
  Top Layer w10: R24_2.1@1212,1377.53 C18_2.2@1260,1377.53 1331.52,1449.05 U1_2.18@1331.52,1503.25 1331.52,1543.48 1326,1549 1316.47,1549 1288,1577.47 R23_2.2@1288,1579.47
NetC21_1: C21.1 U2.C1 | length 112.7
  Top Layer w10: C21.1@408,1767.47 478.47,1767.47 490.99,1779.99 U2.C1@515.52,1779.99
NetC23_1: C23.1 U2.A6 | length 163
  Top Layer w10: U2.A6@673,1842.98 716.98,1842.98 784.53,1910.53 C23.1@808,1910.53
NetC23_2: C23.2 U2.C7 | length 133.1
  Top Layer w10: U2.C7@704.5,1779.99 719.36,1779.99 750.9,1811.53 768.06,1811.53 C23.2@808,1851.47
NetC24_1: C24.1 U2.A4 | length 104.9
  Top Layer w10: C24.1@605.47,1946 605.47,1847.52 U2.A4@610.01,1842.98
NetC24_2: C24.2 U2.A5 | length 112.6
  Top Layer w10: U2.A5@641.5,1842.98 641.5,1886.5 664.53,1909.53 C24.2@664.53,1946
NetC25_1: C25.1 U2.D7 | length 123
  Top Layer w10: U2.D7@704.5,1748.5 710.5,1748.5 757.53,1795.53 C25.1@808,1795.53
NetC27_1: C27.1 R27.2 T10.0 U3.1 | length 243.9
  Top Layer w10: U3.1@1755.58,317.53 R27.2@1842,317.53 ; T10.0@1842,420 R27.2@1842,317.53 ; C27.1@1897,317.53 R27.2@1842,317.53
NetC30_1: C30.1 C31.1 D2.2 T8.0 U3.2 U5.1 | length 470.9
  Top Layer w20: U5.1@1694.26,586.6 1718.39,562.47 C30.1@1754,562.47 1754,493 1705,444 1705,396 U3.2@1705,318.11 1708.05,315.06 1708.05,265 v3(1732.53,240.53)
  Bottom Layer w20: D2.2@1732.53,193 v3(1732.53,240.53)
NetC32_1: C32.1 D3.2 T7.0 U4.2 | length 515.4
  Top Layer w25: C32.1@395,396.53 U4.2@395,318.11 395,253 466,182 D3.2@690.47,182 ; T7.0@605,134 605,181
NetC34_2: C34.2 T14.0 U6.8 U10.10 | length 384.5
  Top Layer w10: T14.0@964,1651 1054.53,1651 ; v2(1042,1611) 1042,1638.47 1054.53,1651 ; U6.8@1091.39,1744.1 1090.53,1743.24 C34.2@1090.53,1687 1054.53,1651
  Bottom Layer w10: U10.10@1018,1480.53 1018,1587 v2(1042,1611)
NetC35_2: C35.2 T13.0 U6.10 U10.5 | length 413.5
  Top Layer w10: U6.10@1121.9,1800.2 C35.2@1173.32,1800.2 ; v2(1136,1747) 1177,1788 C35.2@1177,1796.53 1226.53,1796.53 T13.0@1274,1844
  Bottom Layer w10: U10.5@1018,1671.47 1018,1722 1043,1747 v2(1136,1747)
NetC36_2: C36.2 T12.0 U6.12 U10.3 | length 672.6
  Top Layer w10: v2(918,1745) v2(918,1819) ; U6.12@1122.28,1851 C36.2@1174.53,1851 ; C36.2@1177,1851 C36.2@1174.53,1851 ; C36.2@1177,1853.47 C36.2@1176.53,1853 ; T12.0@1267,1925 1230,1888 v2(1230,1853) C36.2@1176.53,1853 ; C36.2@1174.53,1851 C36.2@1176.53,1853
  Bottom Layer w10: U10.3@918,1671.47 v2(918,1745) ; v2(918,1819) 952,1853 v2(1230,1853)
NetC37_1: C37.1 R30.1 U7.4 | length 194.3
  Top Layer w10: U7.4@928.74,1342.4 978,1293.14 C37.1@978,1217.53 ; R30.1@973.47,1164 C37.1@973.47,1213
NetC37_2: C37.2 R32.1 U7.1 | length 183.8
  Top Layer w10: U7.1@1021.26,1267.6 1058.93,1267.6 R32.1@1110,1216.53 C37.2@1036.06,1216.53
NetC41_1: C41.1 C42.1 R34.2 R35.1 | length 233.8
  Top Layer w10: v1(894,1398) R35.1@943.47,1398 ; R35.1@952.52,1398 1001.52,1447 R34.2@1002.53,1447
  Bottom Layer w10: C42.1@841,1335.53 891.53,1335.53 C41.1@893,1337 893,1397 v1(894,1398)
NetC44_1: C44.1 U8.55 U9.3 | length 1051.8
  Top Layer w10: v1(595,1498) 594.47,1498 C44.1@564,1467.53 U9.3@614.33,1467.53 ; v1(760.86,1282.86) 808.71,1235 862.16,1235 903.16,1194 v1(937,1194) ; v1(1157,1075) 1157,968.47 1174.95,950.52 U8.55@1174.95,902.98
  Bottom Layer w10: v1(595,1498) 595,1466.71 701.36,1360.36 701.36,1342.36 v1(760.86,1282.86) ; v1(937,1194) 960,1194 1015,1139 1015,1118 1039,1094 1138,1094 v1(1157,1075)
NetD1_1: D1.1 R31.1 R34.1 | length 175.1
  Top Layer w10: R31.1@868,1364.53 868,1405.23 909.77,1447 914.83,1447 ; D1.1@885.42,1476.41 914.83,1447 ; R34.1@943.47,1447 914.83,1447
NetP3_2: P3.2 P4.1 | length 118.7
  Top Layer w10: P4.1@825,230.66 v1(825,290)
  Bottom Layer w10: P3.2@825,230.66 v1(825,290)
NetP3_4: P3.4 P4.3 | length 116.7
  Top Layer w10: P4.3@875,230.66 v1(875,289)
  Bottom Layer w10: P3.4@875,230.66 v1(875,289)
NetP3_6: P3.6 P4.5 | length 118.7
  Top Layer w10: P4.5@925,230.66 v1(925,290)
  Bottom Layer w10: P3.6@925,230.66 v1(925,290)
NetP3_8: P3.8 P4.7 | length 116.7
  Top Layer w15: P4.7@975,230.66 v1(975,289)
  Bottom Layer w15: P3.8@975,230.66 v1(975,289)
NetP3_10: P3.10 P4.9 | length 119.3
  Top Layer w10: v1(1025,171) P4.9@1025,230.66
  Bottom Layer w10: v1(1025,171) P3.10@1025,230.66
NetP3_12: P3.12 P4.11 | length 117.3
  Top Layer w10: v1@1075,172 v1(1075,176) P4.11@1075,230.66
  Bottom Layer w10: v1@1075,172 v1(1075,176) P3.12@1075,230.66
NetP3_14: P3.14 P4.13 | length 112.7
  Top Layer w10: P4.13@1125,230.66 v1(1125,287)
  Bottom Layer w10: P3.14@1125,230.66 v1(1125,287)
NetP3_16: P3.16 P4.15 | length 110.7
  Top Layer w10: P4.15@1175,230.66 v1(1175,286)
  Bottom Layer w10: P3.16@1175,230.66 v1(1175,286)
NetR25_1: R25.1 U2.G4 | length 114.2
  Top Layer w10: R25.1@580.53,1552 580.53,1578.53 610.01,1608.01 U2.G4@610.01,1654.01
NetR26_1: R26.1 U2.G5 | length 110.9
  Top Layer w10: U2.G5@641.5,1654.01 641.5,1607.5 660.47,1588.53 R26.1@660.47,1551
NetR28_2: R28.2 T9.0 U3.5 U4.1 | length 2390.9
  Top Layer w10: U4.1@445,318.11 516.83,318.11 822,623.28 v1(822,630) ; T9.0@1408,385 1475.47,317.53 R28.2@1491,317.53 ; v1(1474,361) 1491,344 R28.2@1491,317.53 ; U3.5@1555,318.11 1491.58,318.11 R28.2@1491,317.53
  Bottom Layer w10: v1(822,630) 988,630 1035,677 1526,677 1537.5,688.5 1807.5,688.5 1830,666 1830,501 1785,456 1510,456 1474,420 v1(1474,361)
NetR29_2: R29.2 U6.2 | length 76.6
  Top Layer w10: R29.2@919,1853.47 946.68,1825.8 U6.2@984.1,1825.8
NetR35_2: R35.2 T18.0 U7.3 | length 275.4
  Top Layer w10: T18.0@963,1567 1034,1496 1034,1428.47 1003.53,1398 R35.2@1002.53,1398 1021.26,1379.27 U7.3@1021.26,1342.4
NetR43_1: R43.1 U9.1 U9.4 | length 285.9
  Top Layer w10: U9.4@623.6,1365.74 R43.1@681.34,1308 ; R43.1@681.53,1308 710,1308 735,1333 735,1421.66 U9.1@698.4,1458.26
NetR44_1: R44.1 U8.20 | length 93.8
  Top Layer w10: R44.1@1027,382.53 1027,394 1056.84,423.84 U8.20@1056.84,464
NetU8_27: U8.27 Y1.3 | length 78.3
  Top Layer w10: Y1.3@1193.96,385 U8.27@1193.96,463.33
PWR_EN: P3.9 R27.1 U5.4 | length 1830.4
  Top Layer w10: v1(1392,181) 1393,182 1486.13,182 1505.13,163 1746.53,163 R27.1@1842,258.47 1842,239 1886,195 1911,195 1936,220 1936,403 1797,542 1797,657.31 1746.3,708 1648.34,708 U5.4@1601.74,661.4
  Bottom Layer w10: P3.9@1025,63.34 1025,134 1043.5,152.5 1112.5,152.5 1116,156 1116,161.08 1135.92,181 v1(1392,181)
SCK: P3.5 P4.6 | length 109.3
  Top Layer w10: P4.6@925,63.34 v1(925,118)
  Bottom Layer w10: P3.5@925,63.34 v1(925,118)
V_TEMP: T15.0 U2.G3 U10.12 | length 947.8
  Top Layer w10: v2(343,1606) 343,1795 362,1814 T15.0@362,1880 ; v2(398,1606) 412.72,1620.72 573.75,1620.72 v2(578.51,1625.49) U2.G3@578.51,1654.01
  Bottom Layer w10: v2(343,1606) v2(398,1606) ; v2(578.51,1625.49) 630,1574 838.28,1574 U10.12@918,1494.28
VBAT: D2.1 D3.1 P3.13 P4.14 | length 1219.4
  Top Layer w10: P4.14@1125,63.34 P4.14@1125,94
  Top Layer w12: 787,179 790,182 879,182 881,180 ; 1125.5,180.5 1127,182 1282,182 1283.5,180.5
  Top Layer w15: 881,180 902,159 ; 1106,161 1125.5,180.5 ; 1283.5,180.5 v1(1311,153)
  Top Layer w20: v5(1106,124) 1106,161 ; v1(1424,209) v3(1612,209)
  Top Layer w25: D3.1@751.53,180 787,179 ; 902,159 988,159 1023,124 v5(1106,124) 1125,105 P4.14@1125,63.34
  Bottom Layer w20: v3(1612,209) 1628,193 D2.1@1673.47,193
  Bottom Layer w25: v5@1110,121 1125,106 P3.13@1125,63.34 ; v1@1314,150 1404.84,150 1424,169.16 v1(1424,209)
VOCM: C2_1.2 C2_2.2 C8_1.2 C8_2.2 R43.2 T19.0 U1_1.4 U1_1.9 U1_1.14 U1_1.19 U1_2.4 U1_2.9 U1_2.14 U1_2.19 | length 3586.2
  Top Layer w10: v1(203,900) 257,900 267.3,910.3 267.3,926.58 279.98,939.26 U1_1.14@312.75,939.26 ; v1(210.53,781.53) 251.06,781.53 281.73,812.19 281.73,813.26 U1_1.19@309.3,840.83 ; v1(240,1150) 245,1155 246.91,1155 265.8,1136.11 U1_1.4@312.75,1136.11 ; U1_1.9@313.93,1036.5 U1_1.9@312.75,1037.69 359.31,1037.69 v1(364,1033) ; v1(397,1396) 419,1374 556.47,1374 R43.2@622.47,1308 625.08,1308 654.78,1278.3 702.93,1278.3 764,1339.37 764,1521 831,1588 ; T19.0@884,1652 884,1641 831,1588 ; U1_2.19@1311.83,1506.7 1284.26,1534.27 1283.19,1534.27 1252.53,1564.94 v1(1252.53,1605.47) 1193,1605.47 1175.03,1587.5 997.43,1587.5 987.24,1597.69 938.76,1597.69 929.07,1588 831,1588 ; v1(1371,1606) 1371,1559 1381.3,1548.7 1397.58,1548.7 1410.26,1536.02 U1_2.14@1410.26,1503.25 ; v1(1504,1452) 1508.69,1456.69 U1_2.9@1508.69,1503.25 U1_2.9@1507.5,1502.07 ; U1_2.4@1607.11,1503.25 1607.11,1550.2 v1@1626,1569.09
  Bottom Layer w10: v1(203,900) v1@209,900 ; C8_1.2@210,829.53 210,838 210,900 210,921 236.53,947.53 C2_1.2@236.53,1088 ; v1(210.53,781.53) C8_1.2@210.53,829 ; v1(364,1033) 369,1033 366.5,1035.5 314,1088 C2_1.2@236.53,1088 ; v1(397,1396) 263,1396 214,1347 214,1176 v1(240,1150) 237,1150 236.53,1149.53 C2_1.2@236.53,1091 C2_1.2@236.53,1088 ; v1(1252.53,1605.47) C8_2.2@1300,1605.47 ; C8_2.2@1300.53,1606 1309,1606 v1(1371,1606) 1600,1606 1621,1585 v1@1621,1579 ; v1(1504,1452) 1504,1447 1506.5,1449.5 1559,1502 1559,1579.47 C2_2.2@1562,1579.47 1620.53,1579.47 v1@1621,1579 ; v1(1621,1576) v1@1621,1579
VREFP: C39.1 C40.1 R30.2 R32.2 T17.0 U8.56 | length 594.2
  Top Layer w10: R30.2@1032.53,1164 R32.2@1103.47,1164 ; R32.2@1110,1157.47 1110,1102 ; v1(1154.51,849.51) U8.56@1154.51,902.23 ; U8.56@1155.26,902.98 1155.26,942.74 1133.5,964.5 1133.5,1070.5 1110,1094 1110,1102 ; T17.0@1193,1116 1179,1102 1110,1102
  Bottom Layer w10: v1(1154.51,849.51) C40.1@1154.53,903 C39.1@1154.51,958
pads on no net: D1.3 D4.3 D5.3 P1.2 P2.2 P3.0 P3.11 P4.0 P4.10 P4.12 U1_1.1 U1_1.6 U1_1.11 U1_1.16 U1_2.1 U1_2.6 U1_2.11 U1_2.16 U2.A2 U2.B3 U2.B4 U2.B5 U2.B7 U2.C2 U2.C6 U2.D1 U2.D2 U2.D6 U2.E2 U2.E6 U2.F1 U2.F3 U2.F4 U2.F5 U2.G6 U4.5 U5.3 U6.1 U6.4 U6.9 U6.11 U6.13 U6.16 U6.PAD U8.12 U8.13 U8.14 U8.15 U8.16 U8.17 U8.18 U8.19 U8.33 U8.65
copper on no net: | length 920
  Top Layer w8: 248,517 248,627 598,627 598,566 598,517 248,517

## Polygon pours and split planes (outlines as drawn)
3.3V on Top Layer "5V pour" (solid, remove dead copper, pour order 1001): 2000,484 1832,484 1840,584 1938,637 1938,1757 1730,1965 1111,1965 1111,1950 1072.77,1911.77 1048.23,1911.77 1004,1956 1048,2000 2000,2000
DGND on Top Layer "DGND" (solid, remove dead copper, pour order 1000): 1155,0 1155,180.5 1155.5,181 1468,181 1468,0
5V on Top Layer "5V pour" (solid, remove dead copper, pour order 1002): 0,2000 0,0 2000,0 2000,2000
AGND on Bottom Layer "AGND" (solid, remove dead copper, pour order 1004): 0,2000 2000,2000 2000,0 0,0
DGND on Bottom Layer "DGND" (solid, remove dead copper, pour order 1003): 927,692 1830,692 1830,432 1469,433 1474,361 1595,288 1528,2 1253,1 1253,364 926,364

## Other copper
Top Layer:
  pour cut-out: 888,1415 888,1204 890,1206 1007,1206 1007,1410 1011,1414
  pour cut-out: 661,1999 662,2000 1032.28,2000 1032.28,1763.72 1034,1762 1030,1758 658,1758
  pour cut-out: 1331.72,842.34 1331,843.06 1331,943 1428,943 1438,933 1438,878.53 1390.6,831.13
  pour cut-out: 1026.03,957.86 1028,1063 1026,1036 1024,1043 1138,1044 1283,1052 1286,1047 1283,958.14
  pour cut-out: 898.72,950.3 1044.7,950.3 1047,948 1046,947 1046,691 1043.67,693.33 899,693.33
  pour cut-out: 1783,1671 1789.22,1664.78 1929,1667 1930,1622 1925.76,1566.43 1919,1561 1914.22,1565.78 1786.43,1565.78
  pour cut-out: 1195.57,1566.78 1196.57,1565.78 1786.43,1565.78 1786.43,1255.68 1744,1211 1723,1169 1700.74,1170 1270.78,1170 1191.21,1249.57
  pour cut-out: 952.89,1911.01 1149,1912.53 1152.3,1718.61 993,1718 953,1758
  pour cut-out: 465.25,1892 750.9,1892 750.9,1608.01 464.82,1608.01
  pour cut-out: 266,1231 271,1226 461,1244 644.78,1240.78 654,870 625,788 619,782 601.14,782 536.44,717.3 243.63,717.3 168.63,792.3
  text "Falcon FC" at 276,577 h35
  text "IMU_SENSE.2" at 296,536 h25
Bottom Layer:
  pour cut-out: 1141,1227.01 1141,1565 1233.95,1604.03 1531,1562 1832,1565 1832,1286 1694,1286 1665.4,1225.65
  pour cut-out: 191,1214 410.34,1409.34 474.78,1322.7 522,1209 584,1214 584,675 191,675
  pour cut-out: 748,-1 748,244.44 923,496 926.14,409.72 985,346.97 1187.67,311.33 1188,164 1170,146 1146.48,134.71 1147.16,-1

## Silkscreen, mask and mechanical layers (free items; w line width, h text height)
Top Overlay:
  circle w10: c949,1887 r3
  text "1" at 1664,1825 h24
  text "1" at 181,1459 h24
  text "3.3V" at 1907,871 h24
  text "AGND" at 1901,800 h24
  text "1.8V" at 1912,696 h24
  text "DGND" at 1904,629 h24
  text "5V" at 644,286 h24
  text "AGND" at 642,223 h24
  text "VBAT" at 643,121 h24
Top Solder:
  lines w8: 248,517 248,627 598,627 598,567 598,517 248,517
  text "Falcon FC" at 276,577 h35
  text "IMU_SENSE.2" at 296,536 h25